# Altium PCB EEG_PCB.PcbDoc
Units mil, origin at the board's own origin, x right, y up, seen from the top; angles counter-clockwise.
Board outline 5880 x 1630 mil, 2 copper layers (Top Layer, Bottom Layer); 45 components, 29 nets, 123 pads, 23 vias.
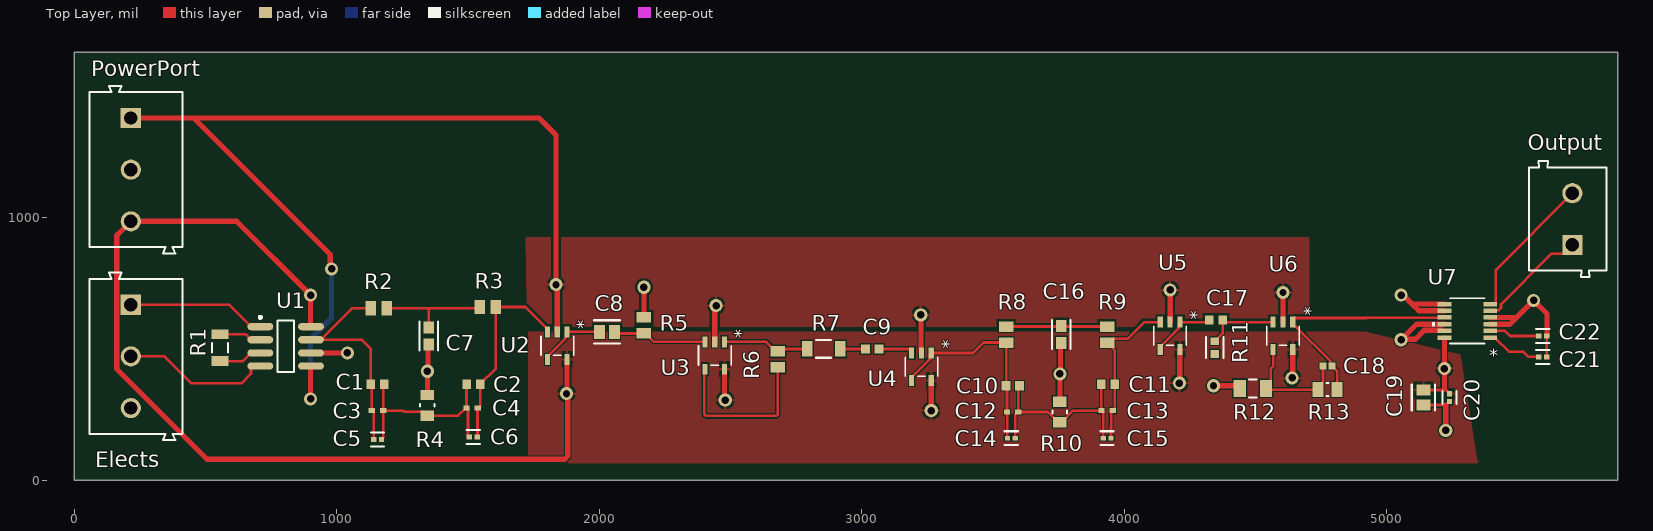
[diagram p0: Top Layer view]
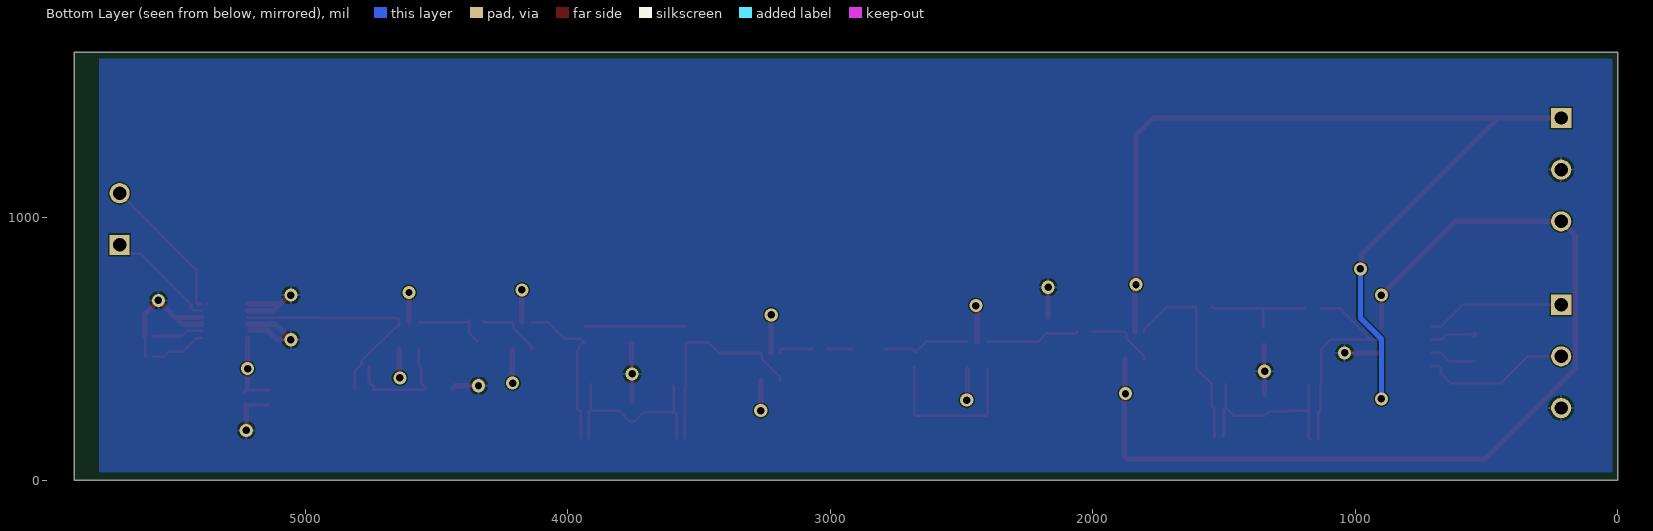
[diagram p1: Bottom Layer view, seen from below]
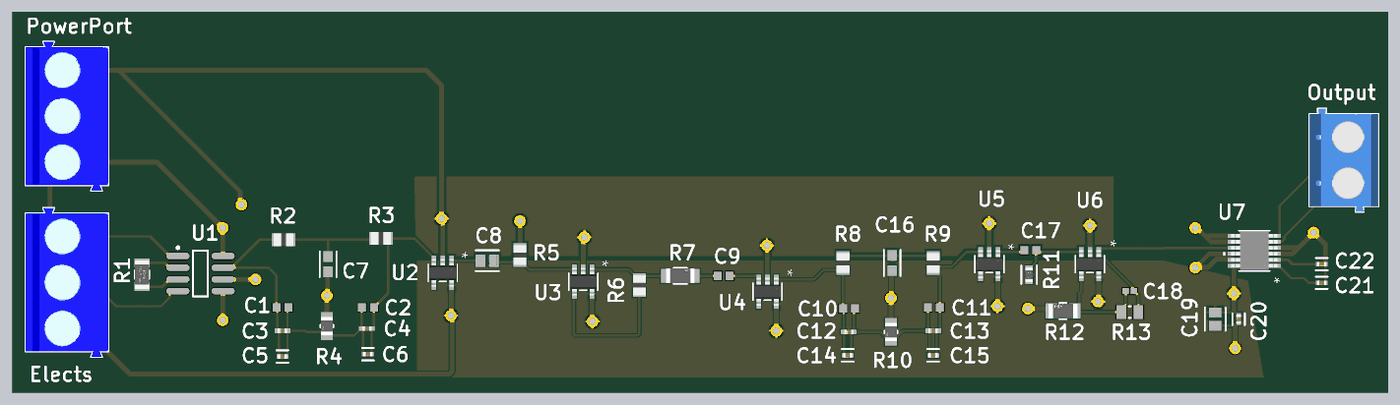
[diagram p2: 3D render of the assembled board from above, using the file's embedded part models]

## Layer stack, top to bottom
Top Solder: solder mask 0.4, Solder Resist, Dk 3.5
Top Layer: signal copper 1.4
Dielectric 1: dielectric 12.6, FR-4, Dk 4.8
Bottom Layer: signal copper 1.4
Bottom Solder: solder mask 0.4, Solder Resist, Dk 3.5

## Board outline
0,0 5880,0 5880,1630 0,1630

## Design rules (kind name [scope] priority, off if disabled: settings)
AcuteAngle [All] p1: minimum=4.50000000000000E+0001 checktracksonly=FALSE
Clearance [All] p1: gap=5 ignorepadtopadclearanceinfootprint=FALSE
DiffPairsRouting [All] p1: maxlimit=10 minlimit=10 mostfreqgap=10 toplayer_minwidth=10 toplayer_maxwidth=20 toplayer_prefwidth=10 bottomlayer_minwidth=10 bottomlayer_maxwidth=20 bottomlayer_prefwidth=10 maxuncoupledlength=500
HoleSize [All] p1: absolutevalues=TRUE maxlimit=250 minlimit=5 maxpercent=80.000 minpercent=20.000
HoleToHoleClearance [All] p1: gap=30 allowstackedmicrovias=TRUE
MinimumSolderMaskSliver [All] p1: minsoldermaskwidth=6
PolygonConnect [All] p1: connectstyle=Relief reliefconductorwidth=10 reliefentries=4 polygonreliefangle="90 Angle" airgapwidth=10
RoutingVias [All] p1: holewidth=15 width=30 viastyle="Through Hole" minholewidth=10 minwidth=10 maxholewidth=28 maxwidth=50
SilkToSolderMaskClearance [IsPad] p1: minsilkscreentomaskgap=5 clearancetoexposedcopper=TRUE
SolderMaskExpansion [All] p1: expansion=5 istentingtop=FALSE
Width [All] p1: maxlimit=20 minlimit=10 preferedwidth=10
25 further rules are at their usual default settings.

## Components (designator, comment, footprint, x,y, rotation, side; value= is the part's Value field where it differs from the comment)
C1 "1uF" CAPC1608X90X35LL15T15 1155,365 r0 top
C2 "1uF" CAPC1608X90X35LL15T15 1520.59,365 r0 top
C3 "220nF" CAP_CL05_SAM 1155,265 r0 top
C4 "220nF" CAP_CL05_SAM 1515.59,275 r0 top
C5 "0.1uF" FP-CL278-IPC_C 1155.1,155 r0 top
C6 "0.1uF" FP-CL278-IPC_C 1520,165 r0 top
C7 "2.2uF" FP-CL10-IPC_A 1350,550 r270 top
C8 "10uF" FP-CL21-IPC_C 2030,565 r0 top
C9 "1uF" CAPC1608X90X35LL15T15 3040,500 r0 top
C10 "1uF" CAPC1608X90X35LL15T15 3575.59,360 r0 top
C11 "1uF" CAPC1608X90X35LL15T15 3938.24,365 r0 top
C12 "220nF" CAP_CL05_SAM 3575,260 r0 top
C13 "220nF" CAP_CL05_SAM 3935,265 r0 top
C14 "0.1uF" FP-CL278-IPC_C 3570,160 r0 top
C15 "0.1uF" FP-CL278-IPC_C 3935,160 r0 top
C16 "2.2uF" FP-CL10-IPC_A 3760,555 r270 top
C17 "1uF" CAPC1608X90X35LL15T15 4350,610 r0 top
C18 "10 nF" CAPC1005X56X25NL10T15 4775,435 r0 top
C19 "10uF" FP-CL21-IPC_C 5140,315 r270 top
C20 "0.1 uF" FP-CL278-IPC_C 5240,315 r270 top
C21 "0.1 uF" FP-CL278-IPC_C 5595,470 r0 top
C22 "0.1 uF" FP-CL278-IPC_C 5595,550 r0 top
Elects "691101710003" 691101710003 234.69,471.84 r270 top
Output "691102710002" 691102710002 5690,995 r90 top
PowerPort "691101710003" 691101710003 234.69,1183.14 r270 top
R1 "560 Ohms" FP-CRGCQ1206-IPC_C 555,505 r270 top value=560Ω
R2 "2K" STA_RNCP0805_STP 1160,655 r0 top
R3 "2K" STA_RNCP0805_STP 1575.5,660 r0 top
R4 "1K" FP-RNCP0805-MFG 1345,285 r90 top
R5 "2K" STA_RNCP0805_STP 2170,589.5 r90 top value=2KΩ
R6 "15K" STA_RNCP0805_STP 2680,460 r90 top value=15KΩ
R7 "5K" FP-RT1206-0_65-MFG 2855,500 r0 top value=5kΩ
R8 "2K" STA_RNCP0805_STP 3550,555 r90 top
R9 "2K" STA_RNCP0805_STP 3935,555 r270 top
R10 "1K" FP-RNCP0805-MFG 3755,260 r90 top
R11 "150KΩ" FP-CRGP0603-IPC_C 4345,505 r270 top
R12 "820Ω" FP-RMCF1206-IPC_C 4490,350 r180 top
R13 "100KΩ" RESC2013X60X30NL20T20 4775,345 r0 top
U1 "AD8221BRZ-R7 Instrumentation Amplifier" ADI-R-8_M 805,510 r0 top
U2 "ADA4610-1ARJZ-R7" RJ_5_ADI 1840,512.72 r270 top
U3 "ADA4610-1ARJZ-R7" RJ_5_ADI 2440,475 r270 top
U4 "ADA4610-1ARJZ-R7" RJ_5_ADI 3227.4,432.28 r270 top
U5 "ADA4610-1ARJZ-R7" RJ_5_ADI 4175,550 r270 top
U6 "ADA4610-1ARJZ-R7" RJ_5_ADI 4605,550 r270 top
U7 "LTC2473CMS#PBF" MSOP-12_MS_LIT 5307.25,607.2 r180 top

## Footprints (in the part's own frame and the unit in brackets; to place one, negate y for a bottom-side part, rotate by r counter-clockwise, add the part's x,y. Pads: shape width x height; smd on the part's side, far side on the other; paste and mask are expansions set on the pad)
691101710003 [mm] "5,00mm - modular - blue - Horizontal entry with pressure clamp - 12,6mm height - 03p"
  rect 1.95x1.95 hole 1.3: 1(-5,-0.5)
  round 1.95 hole 1.3: 2(0,-0.5) 3(5,-0.5)
  silkscreen extent -8.1,-4.5 8.1,4.5, body extent -8.1,-4.5 8.1,4.5, height 12.65
691102710002 [mm] "5,00mm - modular - blue - Horizontal entry with pressure clamp - 9,9 mm height - 02p"
  rect 1.95x1.95 hole 1.3: 1(-2.5,-0.45)
  round 1.95 hole 1.3: 2(2.5,-0.45)
  silkscreen extent -5.6,-3.75 5.6,3.75, body extent -5.6,-3.75 5.6,3.75, height 9.96
ADI-R-8_M [mm] "SOIC, 8-Leads, Body 4.9x3.9mm, Pitch 1.27mm, IPC Low Density"
  oval 2.5x0.7 smd: 1(-2.45,1.905) 2(-2.45,0.635) 3(-2.45,-0.635) 4(-2.45,-1.905) 5(2.45,-1.905) 6(2.45,-0.635) 7(2.45,0.635) 8(2.45,1.905)
  silkscreen extent -2.57,-2.5 0.8,2.93, body extent -2,-2.5 2,2.5, height 1.75
CAP_CL05_SAM [mm]
  rect 0.606x0.5 smd paste+0 mask+0: 1(-0.553,0) 2(0.553,0)
  body extent -0.5,-0.25 0.5,0.25, height 0.55
CAPC1005X56X25NL10T15 [mm] "Chip Capacitor, 2-Leads, Body 1.00x0.50mm, IPC Medium Density"
  rect 0.68x0.64 smd: 1(-0.44,0) 2(0.44,0)
  body extent -0.55,-0.3 0.55,0.3, height 0.56
CAPC1608X90X35LL15T15 [mm] "Chip Capacitor, 2-Leads, Body 1.60x0.81mm, IPC High Density"
  rect 0.85x0.9 smd: 1(-0.65,0) 2(0.65,0)
  body extent -0.88,-0.48 0.87,0.48, height 0.9
FP-CL10-IPC_A [mil]
  rect 45.6x39.85 smd paste+0 mask+0: 1(-32.56,0) 2(32.56,0)
  silkscreen extent -55,-36 55,36, body extent -75,-40 75,40, height 10
FP-CL21-IPC_C [mil]
  rect 41.52x53.39 smd paste+0 mask+0: 1(-28.57,0) 2(28.57,0)
  silkscreen extent -49,-44 49,44, body extent -53,-32 53,32, height 10
FP-CL278-IPC_C [mil]
  rect 20.29x18.6 smd paste+0 mask+0: 1(-14.9,0) 2(14.9,0)
  silkscreen extent -25,-27 25,27, body extent -29,-15 29,15, height 10
FP-CRGCQ1206-IPC_C [mil]
  rect 37.64x63.38 smd paste+0 mask+0: 1(-51.22,0) 2(51.22,0)
  silkscreen extent -18,-31 18,31, body extent -74,-37 74,37, height 10
FP-CRGP0603-IPC_C [mil]
  rect 29.85x31.97 smd paste+0 mask+0: 1(-24.68,0) 2(24.68,0)
  silkscreen extent -40,-33 40,33, body extent -44,-22 44,22, height 10
FP-RMCF1206-IPC_C [mil]
  rect 47.39x65.28 smd paste+0 mask+0: 1(-50.22,0) 2(50.22,0)
  silkscreen extent -15,-34 15,34, body extent -78,-38 78,38, height 10
FP-RNCP0805-MFG [mm]
  rect 1x1.3 smd paste+0 mask+0: 1(-1,0) 2(1,0)
  silkscreen extent -0.13,-0.7 0.13,0.7, body extent -1.6,-0.8 1.6,0.8, height 0.25
FP-RT1206-0_65-MFG [mm]
  rect 1x1.5 smd paste+0 mask+0: 1(-1.6,0) 2(1.6,0)
  silkscreen extent -0.73,-0.85 0.73,0.85, body extent -2.2,-0.95 2.2,0.95, height 0.25
MSOP-12_MS_LIT [mil]
  rect 52.5x17 smd paste+0 mask+0: 1(-87.25,64) 2(-87.25,38.4) 3(-87.25,12.8) 4(-87.25,-12.8) 5(-87.25,-38.4) 6(-87.25,-64) 7(87.25,-64) 8(87.25,-38.4) 9(87.25,-12.8) 10(87.25,12.8) 11(87.25,38.4) 12(87.25,64)
  silkscreen extent -66,-87 134,87, body extent -99,-81 99,81, height 43
RESC2013X60X30NL20T20 [mm] "Chip Resistor, 2-Leads, Body 2.00x1.25mm, IPC Medium Density"
  rect 1.05x1.45 smd: 1(-0.925,0) 2(0.925,0)
  silkscreen extent -0.1,-0.62 0.1,0.62, body extent -1.1,-0.72 1.1,0.72, height 0.6
RJ_5_ADI [mm]
  rect 1.056x0.5 smd paste+0 mask+0: 1(-1.328,0.95) 2(-1.328,0) 3(-1.328,-0.95) 4(1.328,-0.95) 5(1.328,0.95)
  silkscreen extent -0.93,-1.58 0.93,1.58, body extent -1.5,-1.45 1.5,1.45, height 1.45
STA_RNCP0805_STP [mil]
  rect 40x55 smd paste+0 mask+0: 1(-30.5,0) 2(30.5,0)
  body extent -43,-27 43,27, height 24

## Part data
C1 C2 C9 C10 C11 C17: library part CMP-2006-02241-1, Manufacturer=Kemet, Part Number=C0603C105K9PACTU, Capacitance=1uF
C3 C4 C12 C13: library part CL05B224KO5NNNC, "No Description Available", Mfr_Name=Samsung, Supplier Part Number 1=1276-1176-1-ND, Copyright="Copyright (C) 2021 Ultra Librarian. All rights reserved.", Digi-Key_Part_Number_1=1276-1176-2-ND, Digi-Key_Part_Number_2=1276-1176-1-ND, Digi-Key_Part_Number_3=1276-1176-6-ND, Manufacturer_Part_Number=CL05B224KO5NNNC, RefDes=RefDes, Supplier 1=Digi-Key, Type=DEV
C5 C6 C14 C15 C20 C21 C22: library part CMP-13271-000728-1, "Cap Ceramic 100nF 25V X5R ±10% SMD 0402 +85°C Paper T/R", Capacitance=100nF, Case Code (Imperial)=0402, Case Code (Metric)=1005, Dielectric=X5R, Max Operating Temperature=85°C, Min Operating Temperature=-55°C, Package Quantity=1, Tolerance=10%, Voltage=25V, Case/Package=0402, Depth=0.5mm, Height=0.5mm, Lead Free="Lead Free", Length=1mm, Mount="Surface Mount", Packaging="Tape and Reel", Radiation Hardening=No, Thickness=0.022inch, Voltage Rating=25V, Voltage Rating (DC)=25V, Width=0.02inch
C7 C16: library part CMP-13271-003582-1, "Cap Ceramic 2.2uF 10V X7R ±10% Pad SMD 0603 +125°C T/R", Case Code (Imperial)=0603, Case Code (Metric)=1608, Dielectric=X7R, Max Operating Temperature=125°C, Min Operating Temperature=-55°C, Package Quantity=1, Tolerance=10%, Voltage Rating=10V, Capacitance=2.2uF, Case/Package=0603, Contact Plating=Tin, Depth=0.8mm, Height=0.8mm, Length=1.6mm, Material=Ceramic, Mount="Surface Mount", Packaging="Tape and Reel", Radiation Hardening=No, Thickness=0.035inch, Width=0.031inch
C8 C19: library part CMP-13271-001698-1, "CL21 Series 0805 10uF 10V ±10% Tolerance X5R Multilayer Ceramic Chip Capacitor", Case Code (Imperial)=0805, Case Code (Metric)=2012, Dielectric=X5R, Max Operating Temperature=85°C, Min Operating Temperature=-55°C, Tolerance=10%, Voltage Rating=10V, Capacitance=10uF, Case/Package=0805, Contact Plating=Tin, Length=0.079inch, Mount="Surface Mount", Packaging="Tape and Reel", Termination=Wraparound, Thickness=0.053inch, Width=0.049inch
C18: library part CMP-2008-02797-1, Capacitance=10nF, Manufacturer="AVX Interconnect / Elco", Part Number=0402YC103KAT2A
Elects PowerPort: library part CMP-1502-03257-1, "Series 101 - 5.00 mm Horizontal Entry Modular with Pressure Clamp WR-TBL, 3 pin", Manufacturer="Wurth Elektronik", Operating Temperature=-40to105degC, Datasheet URL=http://katalog.we-online.de/em/datasheet/6911017100xx.pdf, Manufacturer URL=http://www.we-online.de, Mounting Technology=THT, Package Reference=691101710003, Packaging=Box, Part Number=691101710003, Pin Number=3, Pitch=5.00mm, Publisher=WurthElektronik
Output: library part CMP-1502-03258-1, "Series 102 - 5.00 mm Horizontal Entry Modular with Pressure Clamp WR-TBL, 2 pin", Manufacturer="Wurth Elektronik", Operating Temperature=-40to105degC, Datasheet URL=http://katalog.we-online.de/em/datasheet/6911027100xx.pdf, Manufacturer URL=http://www.we-online.de, Mounting Technology=THT, Package Reference=691102710002, Packaging=Box, Part Number=691102710002, Pin Number=2, Pitch=5.00mm, Publisher=WurthElektronik
R1: library part CMP-03211-010161-1, "CRGCQ 1206 560R 1%", Ambient Temperature Range High=+70°C, Manufacturer="TE Connectivity", Manufacturer Part Number=CRGCQ1206F560R, Package=CRGCQ1206, Power Rating=0.25W, Resistance=560Ω, Temperature="-55°C to +155°C", Temperature Coefficient=±100ppm/°C, Temperature Range High=+155°C, Temperature Range Low=-55°C, Tolerance=0.01, Voltage Rating=200V, Automotive=Yes, Automotive Grade="Grade 627", Category=Res, ComponentLink2Description=Datasheet, ComponentLink2URL=https://www.te.com/commerce/DocumentDelivery/DDEController?Action=showdoc&DocId=Data+Sheet%7F1773204-3%7F1%7Fpdf%7FEnglish%7FENG_DS_1773204-3_1.pdf%7F4-2176347-636, Composition="Thick Film", Device Class L1="Passive Components", Device Class L2=Resistors, Device Class L3="Chip SMD Resistors", Digikey Description="CRGCQ 1206 560R 1%", Height=0.65mm, Ipc Land Pattern Name=RESC310155X55, Lead Free=Yes, Octopart=https://octopart.com/crgcq1206f560r-te+connectivity-91018289, RoHS=TRUE, Series=CRGCQ
R2 R3 R5 R8 R9: library part RNCP0805FTD2K00, "No Description Available", Mfr_Name="Stackpole International", Copyright="Copyright (C) 2021 Ultra Librarian. All rights reserved.", Digi-Key_Part_Number_1=RNCP0805FTD2K00CT-ND, Digi-Key_Part_Number_2=RNCP0805FTD2K00DKR-ND, Digi-Key_Part_Number_3=RNCP0805FTD2K00TR-ND, Manufacturer_Part_Number=RNCP0805FTD2K00, RefDes=RefDes, Type=DEV
R4 R10: library part CMP-26527-001902-1, "1kΩ ±1% 0.25W 0805 High Power Anti-Sulfur Thin Film Chip Resistor", Case Code (Imperial)=0805, Case Code (Metric)=2012, Max Operating Temperature=155°C, Max Power Dissipation=250mW, Min Operating Temperature=-55°C, Resistance=1kR, Resistor Type="Thin Film", Temperature Coefficient=100ppm/°C, Tolerance=1%, Case/Package=0805, Features="Moisture Resistant", Height=0.024inch, Lead Free="Lead Free", Length=0.079inch, Mount="Surface Mount", Number of Terminations=2, Packaging="Tape and Reel", Power Rating=250mW, RoHS Compliant=Yes, Series=RNCP, Size Code=0805, Width=0.049inch
R6: library part RNCP0805FTD15K0, "No Description Available", Mfr_Name="Stackpole International", Copyright="Copyright (C) 2021 Ultra Librarian. All rights reserved.", Digi-Key_Part_Number_1=RNCP0805FTD15K0CT-ND, Digi-Key_Part_Number_2=RNCP0805FTD15K0DKR-ND, Digi-Key_Part_Number_3=RNCP0805FTD15K0TR-ND, Manufacturer_Part_Number=RNCP0805FTD15K0, RefDes=RefDes, Type=DEV
R7: library part CMP-03412-001731-1, "RES SMD 5K OHM 0.1% 1/4W 1206", Manufacturer=Yageo, Manufacturer Part Number=RT1206BRD075KL, Package=RT1206-0.65, Power Rating=0.25W, Resistance=5kΩ, Temperature="-55°C to +155°C", Temperature Coefficient=25ppm/°C, Temperature Range High=+155°C, Temperature Range Low=-55°C, Tolerance=0.1%, Voltage Rating=200V, Automotive=No, Category=Res, ComponentLink2Description=Datasheet, ComponentLink2URL=https://www.yageo.com/upload/media/product/productsearch/datasheet/rchip/PYu-RT_1-to-0.01_RoHS_L_11.pdf, Composition="Thin Film", Device Class L1="Passive Components", Device Class L2=Resistors, Device Class L3="Chip SMD Resistors", Digikey Description="RES SMD 5K OHM 0.1% 1/4W 1206", Footprint Url=https://www.yageo.com/upload/website/yageo_PYu-R_Mount_10_19050818_343.pdf, Height=0.65mm, Ipc Land Pattern Name=RESC310160X55, Lead Free=Yes, Mouser Description="Thin Film Resistors - SMD 1/4W 5K ohm .1% 25ppm", Octopart=https://octopart.com/rt1206brd075kl-yageo-29806230, RoHS=TRUE, Series=RT
R11: library part CMP-03211-008323-1, "CRGP0603 150KΩ 0.25W ±100ppm/°C 1% 50V", Ambient Temperature Range High=+70°C, Manufacturer=TE, Manufacturer Part Number=CRGP0603F150K, Package=CRGP0603, Power Rating=0.25W, Temperature="-55°C to +155°C", Temperature Coefficient=±100ppm/°C, Temperature Range High=+155°C, Temperature Range Low=-55°C, Tolerance=0.01, Voltage Rating=50V, Automotive=No, Category=Res, ComponentLink2Description=Datasheet, ComponentLink2URL=https://www.te.com/commerce/DocumentDelivery/DDEController?Action=srchrtrv&DocNm=9-1773463-9&DocType=DS&DocLang=English, Composition="Thick Film", Device Class L1="Passive Components", Device Class L2=Resistors, Device Class L3="Chip SMD Resistors", Height=0.55mm, Ipc Land Pattern Name=RESC16080X45, Lead Free=Yes, Octopart=https://octopart.com/crgp0603f150k-te+connectivity-91018727, Resistance=150KΩ, RoHS=TRUE, Series=CRGP
R12: library part CMP-26527-001724-1, "820Ω ±5% 0.25W 1206 Thick Film Chip Resistor AEC-Q200 compliant", Case Code (Imperial)=1206, Case Code (Metric)=3216, Max Operating Temperature=155°C, Max Power Dissipation=250mW, Min Operating Temperature=-55°C, Resistance=820R, Resistor Type="Thick Film", Temperature Coefficient=200ppm/°C, Tolerance=5%, Case/Package=1206, Construction=Rectangular, Contact Plating=Tin, Depth=1.6mm, Features="Automotive AEC-Q200", Height=0.028inch, Length=0.126inch, Military Standard=Not, Mount="Surface Mount", Number of Terminations=2, Packaging="Tape and Reel", Radiation Hardening=No, RoHS Compliant=Yes, Series=RMCF, Width=0.063inch
R13: library part CMP-2001-01994-1, Manufacturer="KOA Speer", Part Number=RK73H2ATTD1003F
U1: library part CMP-0934-00054-1, "Precision Instrumentation Amplifier, 2 V/us, -40 to 125 degC, 8-Pin SOIC (R-8), RoHS, Tape and Reel", Manufacturer="Analog Devices", PartNumber=AD8221BRZ-R7, Quiescent Current="0.9 mA Typ.", Temperature Range="-40 to 125 degC", -3dB Bandwidth@G="1=825 kHz", ComponentLink1Description="Manufacturer URL", ComponentLink1URL=http://www.analog.com/en/index.html, ComponentLink2Description=Datasheet, ComponentLink2URL=http://www.analog.com/static/imported-files/data_sheets/AD8221.pdf, ComponentLink3Description="Package Specification", ComponentLink3URL=http://www.analog.com/static/imported-files/packages/PKG_PDF/SOIC_Narrow%20(R)/R_8.pdf, DatasheetVersion="Rev. C", Mounting Technology="Surface Mount", PackageDescription="8-Pin Standard Small Outline Package, Body 4.9 x 3.9 mm, Pitch 1.27 mm", PackageVersion=Jun-06, Packing="Tape and Reel", RoHS=TRUE, Slew Rate@G="1=2 V/us Typ.", VIO="25 uV Max."
U2 U3 U4 U5 U6: "No Description Available", Mfr_Name="Analog Devices Inc", Copyright="Copyright (C) 2021 Ultra Librarian. All rights reserved.", Digi-Key_Part_Number_1=ADA4610-1ARJZ-R7-ND, Digi-Key_Part_Number_2=ADA4610-1ARJZ-R7CT-ND, Digi-Key_Part_Number_3=ADA4610-1ARJZ-R7DKR-ND, Digi-Key_Part_Number_4=ADA4610-1ARJZ-R7TR-ND, Manufacturer_Part_Number=ADA4610-1ARJZ-R7, RefDes=RefDes, Type=DEV
U7: "No Description Available", Mfr_Name="Analog Devices / Linear Technology", Supplier Part Number 1=LTC2473CMS#PBF-ND, Copyright="Copyright (C) 2021 Ultra Librarian. All rights reserved.", Digi-Key_Part_Number_1=LTC2473CMS#PBF-ND, Manufacturer_Part_Number=LTC2473CMS#PBF, RefDes=RefDes, Supplier 1=Digi-Key, Type=DEV

## Via types
v1: diameter 50, hole 28, Top Layer to Bottom Layer, 23 vias

## Nets (pads, with @x,y where several pads share a name; then routed paths per layer and width w, separated by ;. In a path a pad name is that pad's centre, name@x,y a point inside that pad or via, vN(x,y) a via of type N, cw(c..) or ccw(c..) an arc to the next point about the centre after c; other vN are vias at no path point)
+5: C19.1 C20.1 PowerPort.3 U1.8 U2.5 U3.5 U4.5 U5.5 U6.5 U7.12 | length 4530.9
  Top Layer w10: U1.8@900,586.46 U1.8 ; U5.5@4211.2,496.52 U5.5 ; C19.1 5225.21,343.57 5235.16,333.62 5235.16,335.59 5220,350.75
  Top Layer w20: U1.8@900,586.46 v1(900,705) 618.7,986.3 PowerPort.3 161.61,932.91 161.61,423.39 505,80 1868.28,80 1880,91.72 1880,325 v1(1875,330) 1877.4,332.4 U2.5 ; U3.5 2477.4,307.6 v1(2480,305) ; U4.5 3264.9,379.9 3264.9,265.1 v1(3265,265) ; v1(4210,370) 4211.2,371.2 U5.5@4211.2,496.52 ; v1(4640,390) 4642.24,392.24 4642.24,497.57 U6.5 ; 5220,350.75 v1(5220,425) U7.12
-5: PowerPort.1 U1.5 U2.2 U3.2 U4.2 U5.2 U6.2 | length 4366.9
  Top Layer w20: PowerPort.1 455,1380 ; v1(900,310) 900,433.54 U1.5 ; v1(980,805) 975,810 975,860 455,1380 ; U2.2 1840,740 v1(1835,745) 1835,1315 1770,1380 455,1380 ; U3.2 2440.16,527.43 2440.16,660.16 v1(2445,665) ; v1(3225,630) 3226.2,628.8 3226.2,485.75 U4.2 ; U5.2 v1(4175,725) ; U6.2 v1(4605,715)
  Bottom Layer w20: v1(900,310) 900,537.5 980,617.5 v1(980,805)
GND: C7.2 C16.2 C19.2 C20.2 C21.2 C22.2 Elects.3 PowerPort.2 R4.2 R5.2 R10.2 R12.2 U1.6 U7.3 U7.4 U7.7 U7.8 U7.10 U7.11 | length 2172.1
  Top Layer w10: C7.2@1345,512.44 C7.2 ; C19.2 5225.21,286.43 ; C21.2@5610.75,470 5610,470 5610.75,470.75 C22.2@5610.75,550
  Top Layer w20: U1.6 v1(1040,485) ; R4.2 v1(1345,415) 1347.5,417.5 1347.5,509.94 C7.2@1345,512.44 ; R5.2 v1(2170,735) ; R10.2 v1(3755,405) 3757.5,407.5 3757.5,519.94 C16.2 ; v1(4340,360) 4429.78,360 R12.2 ; v1(5055,535) v1@5056.79,536.79 ; v1(5055,705) 5063.12,705 5096.92,671.2 ; U7.11@5210,571.7 5144.91,571.7 5110,536.79 v1@5056.79,536.79 ; U7.10 5114.4,594.4 v1@5056.79,536.79 ; U7.8 5122.52,645.6 5096.92,671.2 ; U7.7 5096.92,671.2 ; v1(5225,190) 5225,286.22 5225.21,286.43 ; U7.3 5469.4,594.4 5495,620 ; U7.4 5495,620 ; C22.2@5610.75,550 5610.75,634.25 v1(5560,685) 5495,620
NetC1_1: C1.1 C3.1 C5.1 R2.1 U1.7 | length 835.8
  Top Layer w10: U1.7 U1.7@936.89,535 ; R2.1 1056.89,655 U1.7@936.89,535 ; C5.1 1140.19,260.12 1135.31,265 C3.1 1133.24,361.17 C1.1 1129.41,500.59 1095,535 U1.7@936.89,535
NetC1_2: C1.2 C2.1 C3.2 C4.1 C5.2 C6.1 R4.1 | length 759.4
  Top Layer w10: C5.2 1170.84,155 1176.76,160.92 C3.2 ; C1.2 1176.76,361.17 C3.2 ; C2.1 1493.83,363.83 1493.83,277.08 C4.1@1491.75,275 ; C6.1 1504.25,165 1499.95,169.3 1499.95,270.16 1495.11,275 C4.1 C4.1@1491.75,275 ; C3.2 1251.7,265 1256.39,260.32 1330.31,260.32 R4.1 1462.38,245.63 C4.1@1491.75,275
NetC2_2: C2.2 C4.2 C6.2 R3.2 U2.3 | length 768
  Top Layer w10: C6.2 1536.13,166.22 1536.13,273.77 C4.2 1539.43,275 1546.18,281.75 C2.2 1546.18,365.98 1606,425.8 R3.2 1718.54,660 1802.6,575.94 U2.3
NetC7_1: C7.1 R2.2 R3.1 | length 429
  Top Layer w10: R2.2 1350,655 ; C7.1 1350,655 ; R3.1 1540,655 1350,655
NetC8_1: C8.1 U2.1 U2.4 | length 259.6
  Top Layer w10: U2.4 1802.6,471.38 1872.56,541.35 1872.56,560.16 U2.1 C8.1
NetC8_2: C8.2 R5.1 U3.3 | length 359.6
  Top Layer w10: C8.2 2064.57,559 R5.1 2177.5,559 2209.22,527.28 U3.3
NetC9_1: C9.1 R7.2 | length 96.4
  Top Layer w10: R7.2 C9.1
NetC9_2: C9.2 U4.3 | length 137
  Top Layer w10: C9.2 3185.16,500 3190,495.16 U4.3
NetC10_1: C10.1 C12.1 C14.1 R8.1 U4.1 U4.4 | length 803.9
  Top Layer w10: U4.4 3190,390.94 3259.96,460.9 3259.96,479.71 U4.1 3424.55,484.55 3464.5,524.5 R8.1 C10.1 3553.24,356.76 C12.1 3554.17,259.07 3554.17,160.93 C14.1
NetC10_2: C10.2 C11.1 C12.2 C13.1 C14.2 C15.1 R10.1 | length 773.7
  Top Layer w10: C14.2 3584.9,250.22 3594.69,260 C12.2 ; C10.2 3596.76,355.58 C12.2 ; R10.1@3755,224.37 R10.1@3751.26,220.63 ; C11.1 3913.24,364.41 C13.1 ; C15.1 3920.1,260.16 3915.25,265 C13.1 ; C12.2 3709.72,260 3749.09,220.63 R10.1@3751.26,220.63 ; R10.1@3751.26,220.63 R10.1 3760.91,220.63 3805.28,265 C13.1
NetC11_2: C11.2 C13.2 C15.2 R9.2 U5.3 | length 620
  Top Layer w10: R9.2 R9.2@3938.75,524.5 ; C15.2 3949.9,199.9 3950,200 3950,260.16 3954.84,265 C13.2 3958.84,265 3963.83,269.98 C11.2 3963.83,495.67 3957.5,502 3957.5,509.5 3942.5,524.5 R9.2@3938.75,524.5 ; U5.3 4076.52,602.28 4013.74,539.5 3953.75,539.5 R9.2@3938.75,524.5
NetC16_1: C16.1 R8.2 R9.1 | length 385
  Top Layer w10: R8.2 R9.1
NetC17_1: C17.1 U5.1 U5.4 | length 250.7
  Top Layer w10: U5.4 4137.6,508.66 4207.56,578.62 4207.56,597.43 U5.1 4316.69,602.28 C17.1
NetC17_2: C17.2 R11.1 U6.3 | length 288.8
  Top Layer w10: R11.1 4346.06,529.68 4375,558.62 4375,605 4375.59,605.59 C17.2 4383.31,602.28 U6.3
NetC18_1: C18.1 R12.1 R13.1 U6.4 | length 460.8
  Top Layer w10: U6.4 4567.6,434.13 4558.92,425.45 4558.92,368.7 R12.1 4545.22,345 R13.1 4738.58,358.58 4740,360 4745.71,360 4754.25,368.54 4754.25,374.25 4757.68,377.68 C18.1
NetC18_2: C18.2 R13.2 U6.1 U7.9 | length 922.7
  Top Layer w10: R13.2 4811.42,416.69 4793.11,435 C18.2 4786.06,441.26 4786.06,453.81 4653.38,586.5 4647.24,586.5 4642.4,591.34 4642.4,613.21 4647.24,618.06 4922.32,618.06 4923.67,619.4 5219.4,619.4 U7.9
NetC21_1: C21.1 U7.1 | length 215.1
  Top Layer w10: U7.1 5406.8,543.2 5410,540 5415.45,540 5465.45,490 5520.45,490 5540.45,470 C21.1@5579.25,470
NetC22_1: C22.1 U7.2 | length 193.9
  Top Layer w10: U7.2@5395.1,569.4 U7.2 5450.7,568.8 5470.1,549.4 5578.65,549.4 C22.1@5579.25,550
NetElects_1: Elects.1 U1.1 | length 528.2
  Top Layer w10: Elects.1 589.41,668.7 673.11,585 U1.1
NetElects_2: Elects.2 U1.4 | length 575.5
  Top Layer w10: Elects.2 343.15,471.85 445,370 635,370 635.86,369.14 672.94,406.22 672.94,426.89 681.05,435 U1.4
NetOutput_1: Output.1 U7.5 | length 425.1
  Top Layer w10: U7.5 5396.6,647.7 5426.96,647.7 5435.75,656.49 5435.75,670 5628.94,863.19 5674.33,863.19 Output.1
NetOutput_2: Output.2 U7.6 | length 567.3
  Top Layer w10: U7.6@5373.25,674.7 U7.6@5376.75,671.2 ; U7.6 5412.25,671.2 5415.75,674.7 5415.75,801.46 Output.2
NetR1_1: R1.1 U1.2 | length 177.4
  Top Layer w10: R1.1@545,556.22 651.89,556.22 673.11,535 U1.2
  Top Layer w20: R1.1@545,556.22 R1.1@548.56,552.67
NetR1_2: R1.2 U1.3 | length 176.5
  Top Layer w10: R1.2@545,453.78 641.89,453.78 673.11,485 U1.3
NetR6_1: R6.1 U3.4 | length 636.4
  Top Layer w10: U3.4 2400,420.13 2400,250.86 2405.86,245 2674.14,245 2680,250.86 R6.1
NetR6_2: R6.2 R7.1 U3.1 | length 333.8
  Top Layer w10: U3.1 2635.72,527.28 2672.5,490.5 R6.2 2689.5,500 R7.1
pads on no net: R11.2

## Polygon pours and split planes (outlines as drawn)
+5 on Top Layer "+5_L01_P004" (solid, pour order 4): 1730,565.01 4920.65,565.01 5280,480 5345,75 5350,70 5345,65 1730,65
-5 on Top Layer "-5_L01_P001" (solid, pour order 1): 1718.77,925 4705,925 4705,585 1725.19,585
GND on Bottom Layer "GND_L02_P003" (solid, pour order 3): 20,1610 25,1605 5785,1605 5785,25 5780,30 20,30

## Text inside footprints (layer, text, board x,y; h text height)
U2: Top Overlay "*" at 1895,610 h50 r270; Mechanical 13 "*" at 1854.09,546.72 h50 r270
U3: Top Overlay "*" at 2495,575 h50 r270; Mechanical 13 "*" at 2454.09,509 h50 r270
U4: Top Overlay "*" at 3285,535 h50 r270; Mechanical 13 "*" at 3241.49,466.27 h50 r270
U5: Top Overlay "*" at 4230,645 h50 r270; Mechanical 13 "*" at 4189.09,584 h50 r270
U6: Top Overlay "*" at 4665,660 h50 r270; Mechanical 13 "*" at 4619.09,584 h50 r270
U7: Top Overlay "*" at 5425,520 h50 r180; Mechanical 13 "*" at 5365.75,578.7 h50 r180